# Allegro board 8880F5-0811-1.brd
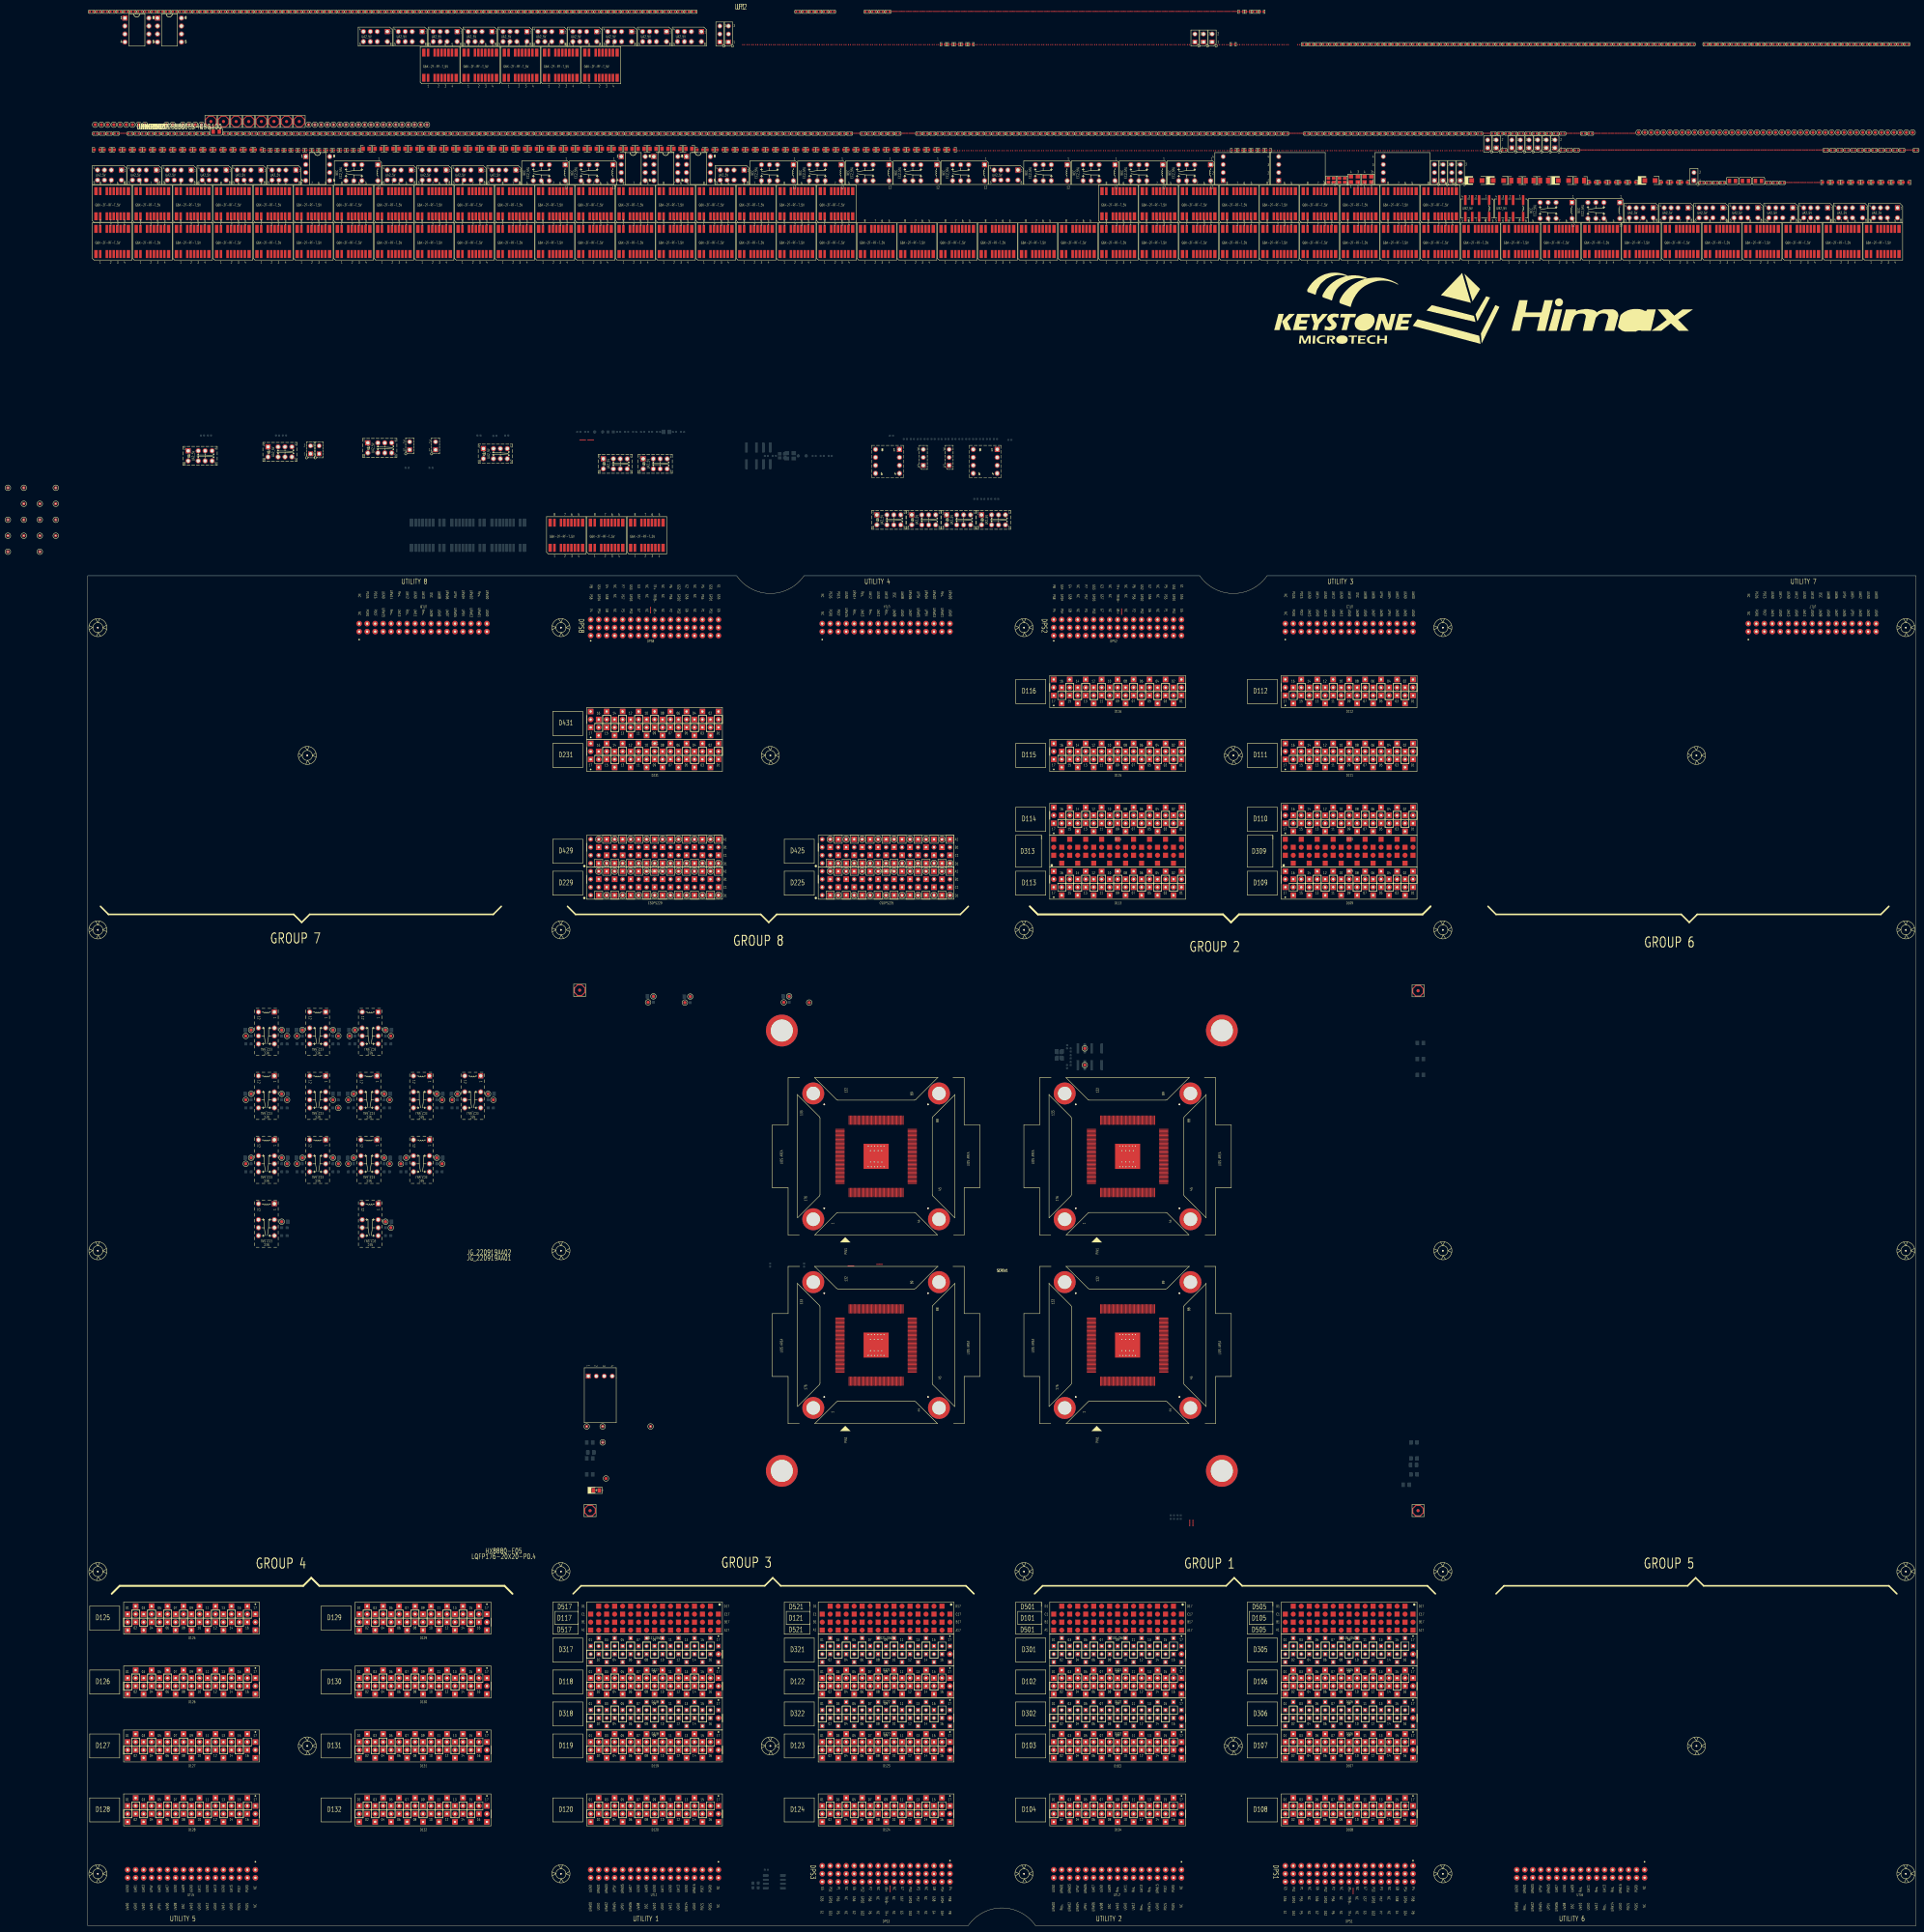
[diagram p0: board, top side]
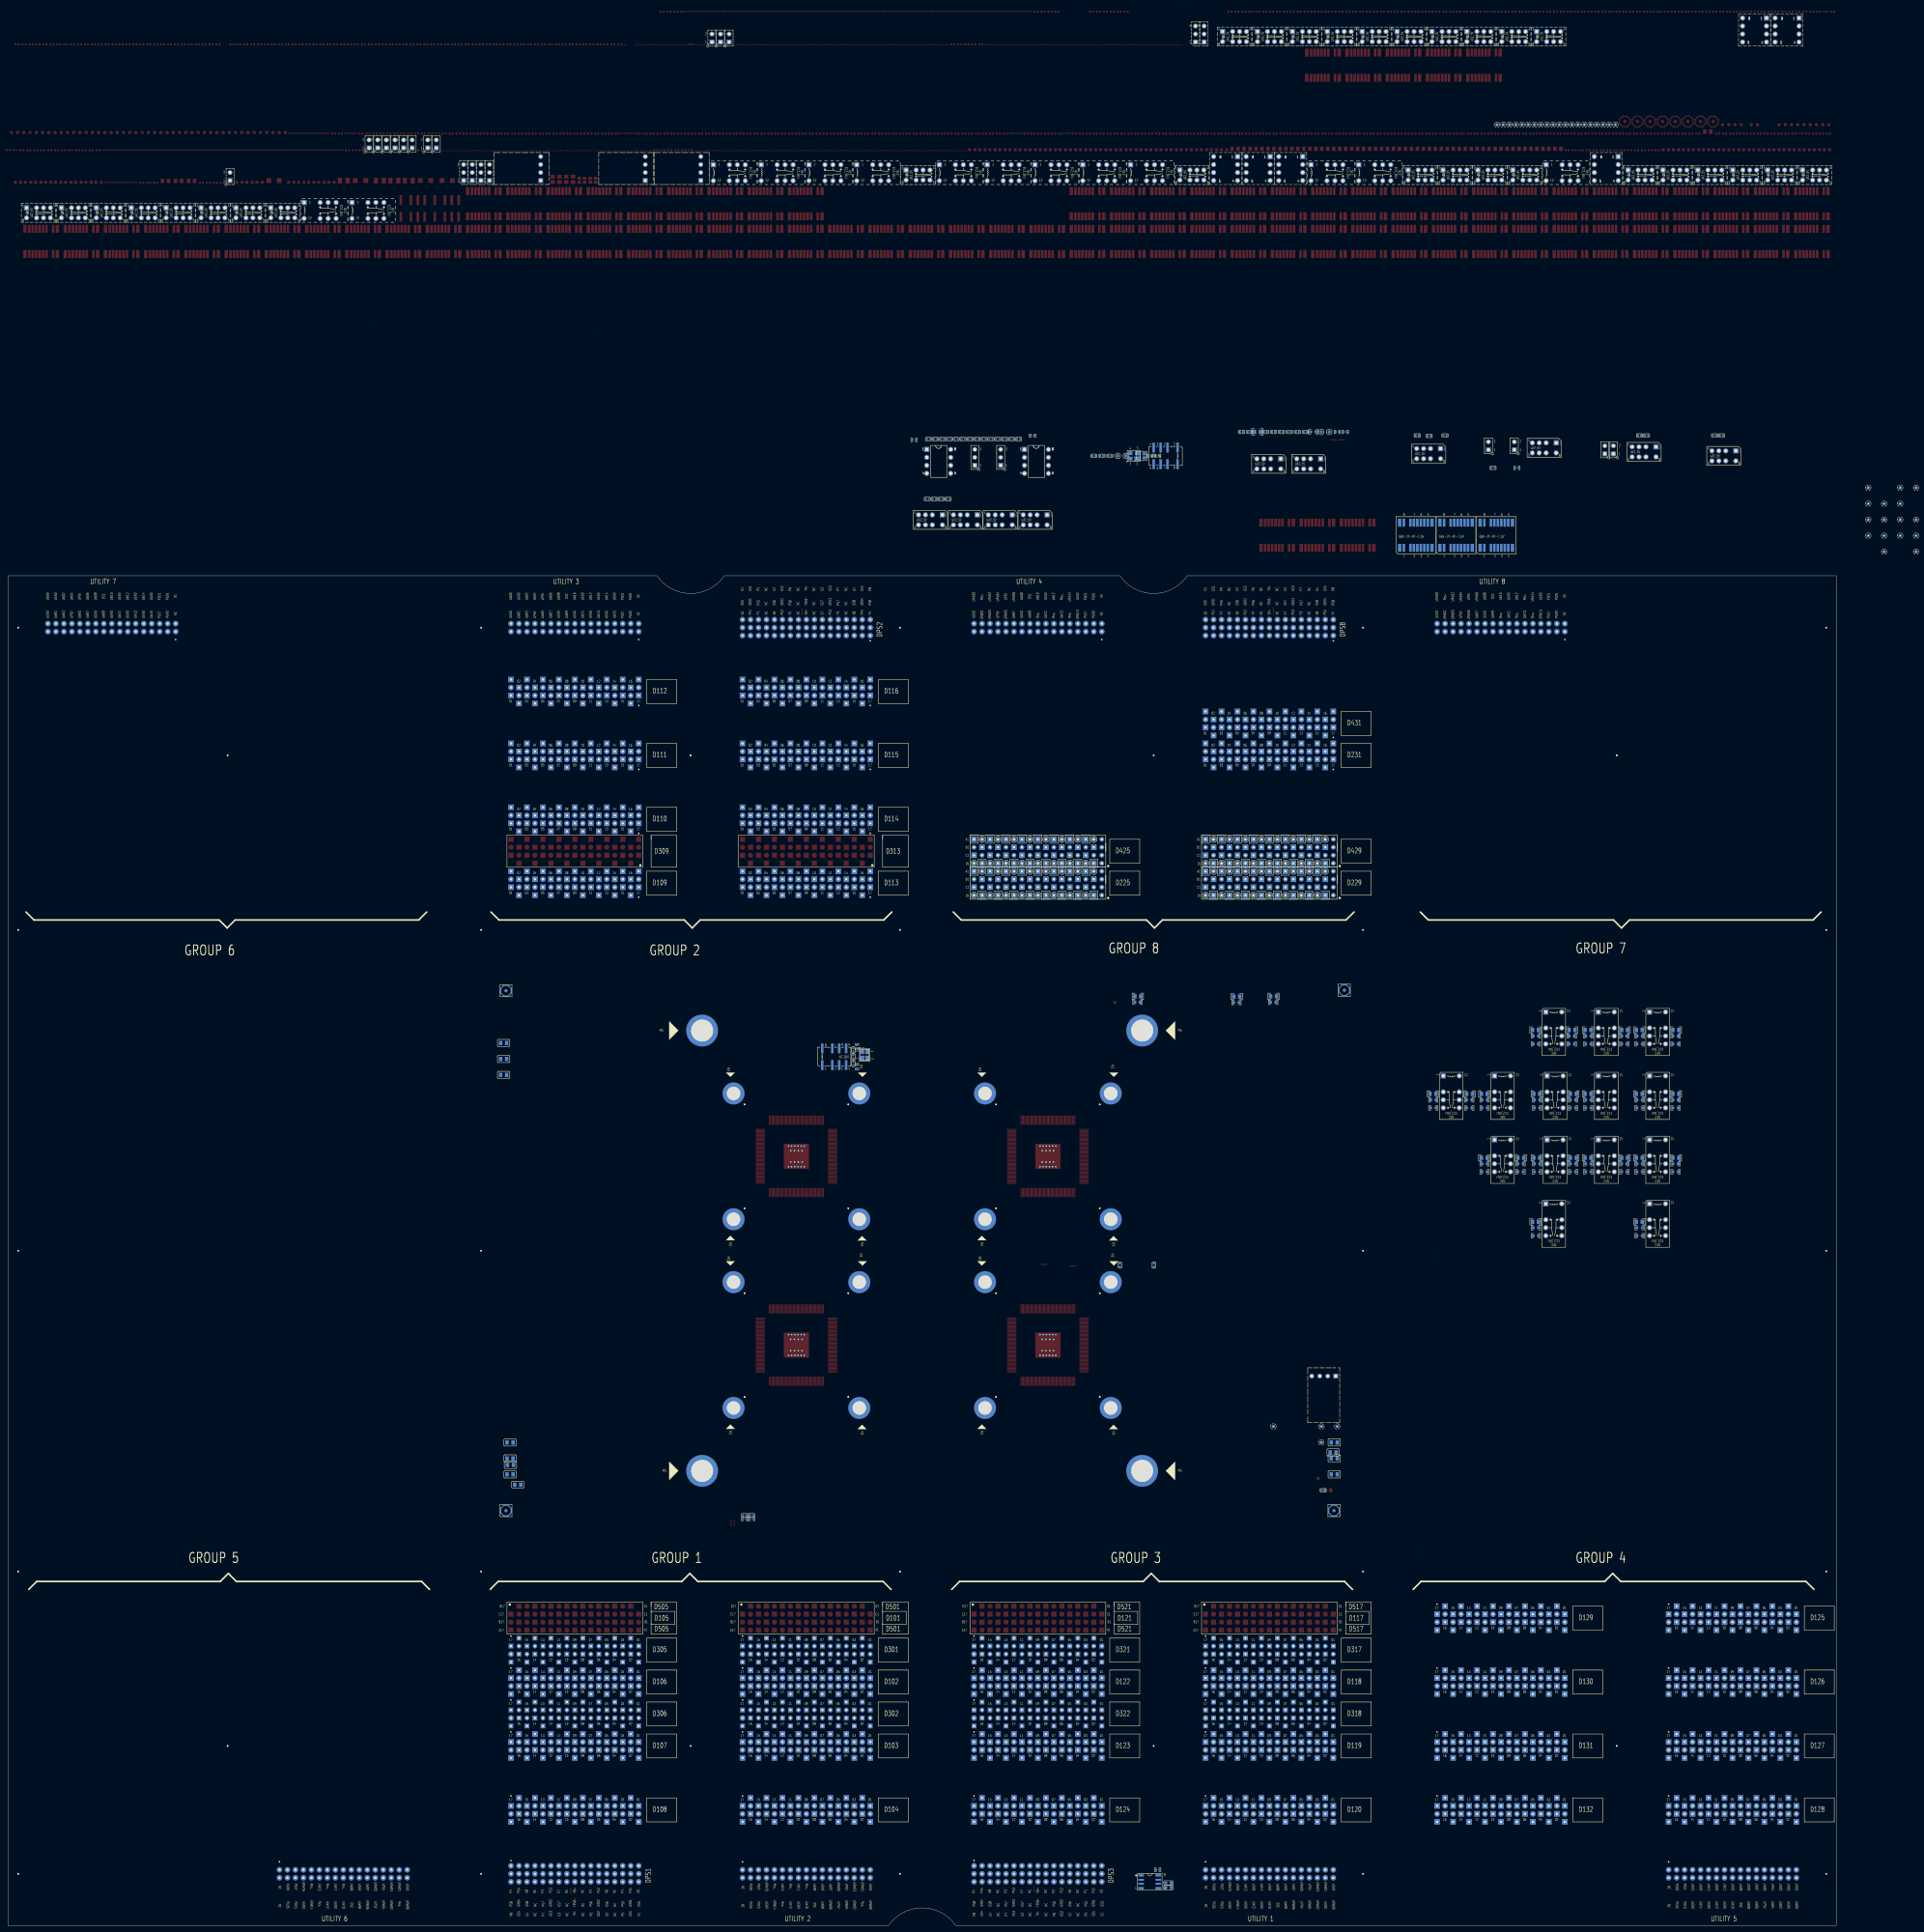
[diagram p1: board, bottom side, seen from below]

Outline 581.66 x 429.26 mm; copper layers: TOP, L02_DGND, L03_SIGNAL, L04_DGND, L05_SIGNAL, L06_DGND, L07_SIGNAL, L08_DGND, L09_SIGNAL, L10_DGND, L11_POWER, L12_DGND, L13_POWER, L14_DGND, L15_POWER, L16_DGND, L17_5V, L18_CBIT, L19_DGND, L20_POWER, L21_DGND, L22_POWER, L23_DGND, L24_POWER, L25_DGND, L26_SIGNAL, L27_DGND, L28_SIGNAL, L29_DGND, L30_SIGNAL, L31_DGND, L32_SIGNAL, L33_DGND, BOTTOM. Coordinates in mm from the lower left corner of the outline.

## Placement (name value [footprint] x y rotation side)
BD29  BD120-3A-S8  [FB0805]  159.72 143.51 180 bottom
BD30  BD120-3A-S8  [FB0805]  159.72 153.67 180 bottom
BD31  BD120-3A-S8  [FB0805]  160.07 150.51 0 bottom
BD32  BD120-3A-S8  [FB0805]  423.98 280.67 180 bottom
BD33  BD120-3A-S8  [FB0805]  423.98 275.59 180 bottom
BD34  BD120-3A-S8  [FB0805]  419.48 140.21 0 bottom
BD35  BD120-3A-S8  [FB0805]  421.94 148.59 180 bottom
BD36  BD120-3A-S8  [FB0805]  159.72 148.59 180 bottom
BD37  BD120-3A-S8  [FB0805]  421.94 153.67 180 bottom
BD38  BD120-3A-S8  [FB0805]  423.98 270.51 180 bottom
BD39  BD120-3A-S8  [FB0805]  421.8 146.5 0 bottom
BD40  BD120-3A-S8  [FB0805]  421.94 143.51 180 bottom
BD41  BD120-3A-S8  [FB0805]  531.55 554.78 0 top
BD42  BD120-3A-S8  [FB0805]  527.41 554.78 0 top
BD43  BD120-3A-S8  [FB0805]  523.27 554.78 0 top
BD44  BD120-3A-S8  [FB0805]  40.9 570.43 0 top
BR902  330-1-S4  [R0402]  163.26 138.43 180 bottom
C3  0.1U-16-X-S4-MU  [C0402]  158.75 474.98 180 bottom
C4  0.1U-16-X-S4-MU  [C0402]  156.21 474.98 180 bottom
C5  22P-50-N-S4-AVX  [C0402]  218.44 467.36 180 bottom
C6  22P-50-N-S4-AVX  [C0402]  215.9 467.36 180 bottom
C7  0.1U-16-X-S4-MU  [C0402]  101.6 463.55 180 bottom
C8  0.1U-16-X-S4-MU  [C0402]  255.7 473.77 180 bottom
C9  0.1U-16-X-S4-MU  [C0402]  293.37 472.44 180 bottom
CA1  NC/10U-10-X6S-S6-MU  [C0603]  128.2 262.58 0 bottom
CA2  NC/47U-10-X5R-S8-TDK  [C0805]  128.3 264.49 0 bottom
CA3  NC/10U-10-X6S-S6-MU  [C0603]  116.77 262.58 180 bottom
CA4  NC/47U-10-X5R-S8-TDK  [C0805]  116.67 264.49 180 bottom
CA5  NC/10U-10-X6S-S6-MU  [C0603]  95.59 221.94 0 bottom
CA6  NC/47U-10-X5R-S8-TDK  [C0805]  95.69 223.85 0 bottom
CA7  NC/10U-10-X6S-S6-MU  [C0603]  95.59 282.9 0 bottom
CA8  NC/47U-10-X5R-S8-TDK  [C0805]  95.69 284.81 0 bottom
CA9  NC/10U-10-X6S-S6-MU  [C0603]  84.16 282.9 180 bottom
CA10  NC/47U-10-X5R-S8-TDK  [C0805]  84.06 284.81 180 bottom
CA11  NC/10U-10-X6S-S6-MU  [C0603]  95.18 262.58 0 bottom
CA12  NC/47U-10-X5R-S8-TDK  [C0805]  95.28 264.49 0 bottom
CA13  NC/47U-10-X5R-S8-TDK  [C0805]  112 244.17 0 bottom
CA14  NC/10U-10-X6S-S6-MU  [C0603]  111.9 242.26 0 bottom
CA15  NC/47U-10-X5R-S8-TDK  [C0805]  100.37 244.17 180 bottom
CA16  NC/10U-10-X6S-S6-MU  [C0603]  100.47 242.26 180 bottom
CA17  NC/47U-10-X5R-S8-TDK  [C0805]  95.28 244.17 0 bottom
CA18  NC/10U-10-X6S-S6-MU  [C0603]  95.18 242.26 0 bottom
CA19  NC/47U-10-X5R-S8-TDK  [C0805]  184.15 474.98 180 bottom
CA20  NC/10U-10-X6S-S6-MU  [C0603]  166.37 474.98 180 bottom
CA21  10U-10-X6S-S6-MU  [C0603]  128.2 260.04 0 bottom
CA22  10U-10-X6S-S6-MU  [C0603]  116.77 260.04 180 bottom
CA23  10U-10-X6S-S6-MU  [C0603]  95.59 219.4 0 bottom
CA24  10U-10-X6S-S6-MU  [C0603]  95.59 280.36 0 bottom
CA25  10U-10-X6S-S6-MU  [C0603]  84.16 280.36 180 bottom
CA26  10U-10-X6S-S6-MU  [C0603]  95.18 260.04 0 bottom
CA27  10U-10-X6S-S6-MU  [C0603]  111.9 239.72 0 bottom
CA28  10U-10-X6S-S6-MU  [C0603]  100.47 239.72 180 bottom
CA29  10U-10-X6S-S6-MU  [C0603]  95.18 239.72 0 bottom
CA30  NC/47U-10-X5R-S8-TDK  [C0805]  222.21 295.51 180 bottom
CA31  10U-10-X6S-S6-MU  [C0603]  222.31 293.6 180 bottom
CA32  NC/10U-10-X6S-S6-MU  [C0603]  111.9 262.58 0 bottom
CA33  NC/47U-10-X5R-S8-TDK  [C0805]  112 264.49 0 bottom
CA34  10U-10-X6S-S6-MU  [C0603]  111.9 260.04 0 bottom
CA35  NC/10U-10-X6S-S6-MU  [C0603]  83.75 262.58 180 bottom
CA36  NC/47U-10-X5R-S8-TDK  [C0805]  83.65 264.49 180 bottom
CA37  10U-10-X6S-S6-MU  [C0603]  83.75 260.04 180 bottom
CA38  NC/10U-10-X6S-S6-MU  [C0603]  83.75 242.26 180 bottom
CA39  NC/47U-10-X5R-S8-TDK  [C0805]  83.65 244.17 180 bottom
CA40  10U-10-X6S-S6-MU  [C0603]  83.75 239.72 180 bottom
CB1  0.1U-25-X-S6  [C0603]  501.64 554.34 0 top
CB2  10U-16-T-SA  [CODE_A]  448.82 554.91 0 top
CB3  0.1U-25-X-S6  [C0603]  485.14 554.34 0 top
CB4  10U-16-T-SA  [CODE_A]  441.94 554.91 0 top
CB5  0.1U-25-X-S6  [C0603]  481.94 554.34 0 top
CB6  10U-16-T-SA  [CODE_A]  469.51 554.91 0 top
CB7  0.1U-25-X-S6  [C0603]  478.74 554.34 0 top
CB8  10U-16-T-SA  [CODE_A]  497.01 554.91 0 top
CB9  0.1U-25-X-S6  [C0603]  504.84 554.34 0 top
CB10  10U-25-X7R-SA  [C1206]  474.83 554.89 0 top
CB11  0.1U-25-X-S6  [C0603]  508.04 554.34 0 top
CB12  10U-25-X7R-SA  [C1206]  463.35 554.89 0 top
CB13  0.1U-25-X-S6  [C0603]  491.55 554.34 0 top
CB14  10U-25-X7R-SA  [C1206]  458.75 554.89 0 top
CB15  0.1U-25-X-S6  [C0603]  488.35 554.34 0 top
CB16  10U-25-X7R-SA  [C1206]  454.14 554.89 0 top
CB19  0.1U-25-X7R-S4-MU  [C0402]  215.9 17.78 180 bottom
CC1  0.47U-10-X6S-S2-TY  [C0201]  369.03 598.09 0 top
CC2  4.7U-10-X6T-S4-MU  [C0402]  274.41 598.23 0 top
CC4  0.47U-10-X6S-S2-TY  [C0201]  245.15 598.09 0 top
CC6  0.47U-10-X6S-S2-TY  [C0201]  246.56 598.09 0 top
CC7  0.47U-10-X6S-S2-TY  [C0201]  247.96 598.09 0 top
CC8  0.47U-10-X6S-S2-TY  [C0201]  249.36 598.09 0 top
CC9  0.47U-10-X6S-S2-TY  [C0201]  250.77 598.09 0 top
CC11  0.47U-10-X6S-S2-TY  [C0201]  231.12 598.09 0 top
CC13  0.47U-10-X6S-S2-TY  [C0201]  232.52 598.09 0 top
CC15  4.7U-2.5-X6S-S2-MU  [C0201]  264.8 598.09 0 top
CC16  NC/4.7U-2.5-X6S-S2-MU  [C0201]  270.41 598.09 0 top
CC17  4.7U-2.5-X6S-S2-MU  [C0201]  257.78 598.09 0 top
CC19  0.47U-10-X6S-S2-TY  [C0201]  233.93 598.09 0 top
CC20  4.7U-10-X6T-S4-MU  [C0402]  281.02 598.23 0 top
CC22  0.47U-10-X6S-S2-TY  [C0201]  235.33 598.09 0 top
CC23  4.7U-10-X6T-S4-MU  [C0402]  364.42 598.23 0 top
CC25  0.47U-10-X6S-S2-TY  [C0201]  236.73 598.09 0 top
CC26  0.47U-10-X6S-S2-TY  [C0201]  238.14 598.09 0 top
CC27  0.47U-10-X6S-S2-TY  [C0201]  239.54 598.09 0 top
CC28  0.47U-10-X6S-S2-TY  [C0201]  240.94 598.09 0 top
CC29  0.47U-10-X6S-S2-TY  [C0201]  243.75 598.09 0 top
CC30  0.47U-10-X6S-S2-TY  [C0201]  242.35 598.09 0 top
CC31  0.47U-10-X6S-S2-TY  [C0201]  367.62 598.09 0 top
CC32  0.47U-10-X6S-S2-TY  [C0201]  366.22 598.09 0 top
CC33  0.47U-10-X6S-S2-TY  [C0201]  323.52 598.09 0 top
CC34  0.47U-10-X6S-S2-TY  [C0201]  284.23 598.09 0 top
CC35  0.47U-10-X6S-S2-TY  [C0201]  361.21 598.09 0 top
CC36  0.47U-10-X6S-S2-TY  [C0201]  359.81 598.09 0 top
CC37  0.47U-10-X6S-S2-TY  [C0201]  282.83 598.09 0 top
CC38  NC/4.7U-2.5-X6S-S2-MU  [C0201]  267.6 598.09 0 top
CC39  0.47U-10-X6S-S2-TY  [C0201]  208.67 598.09 0 top
CC40  4.7U-2.5-X6S-S2-MU  [C0201]  259.18 598.09 0 top
CC41  4.7U-2.5-X6S-S2-MU  [C0201]  260.59 598.09 0 top
CC42  4.7U-2.5-X6S-S2-MU  [C0201]  261.99 598.09 0 top
CD1  0.1U-10-X7R-S2-MU  [C0201]  296.86 598.09 0 top
CD3  0.1U-10-X7R-S2-MU  [C0201]  341.76 598.09 0 top
CD4  0.1U-10-X7R-S2-MU  [C0201]  343.16 598.09 0 top
CD5  0.1U-10-X7R-S2-MU  [C0201]  344.56 598.09 0 top
CD6  0.1U-10-X7R-S2-MU  [C0201]  345.97 598.09 0 top
CD7  0.1U-10-X7R-S2-MU  [C0201]  347.37 598.09 0 top
CD8  0.1U-10-X7R-S2-MU  [C0201]  348.77 598.09 0 top
CD9  0.1U-10-X7R-S2-MU  [C0201]  350.18 598.09 0 top
CD10  0.1U-10-X7R-S2-MU  [C0201]  330.53 598.09 0 top
CD11  0.1U-10-X7R-S2-MU  [C0201]  331.94 598.09 0 top
CD12  0.1U-10-X7R-S2-MU  [C0201]  333.34 598.09 0 top
CD13  0.1U-10-X7R-S2-MU  [C0201]  334.74 598.09 0 top
CD14  0.1U-10-X7R-S2-MU  [C0201]  336.15 598.09 0 top
CD15  0.1U-10-X7R-S2-MU  [C0201]  337.55 598.09 0 top
CD16  0.1U-10-X7R-S2-MU  [C0201]  338.95 598.09 0 top
CD17  0.1U-10-X7R-S2-MU  [C0201]  340.35 598.09 0 top
CD18  0.1U-10-X7R-S2-MU  [C0201]  298.26 598.09 0 top
CD19  0.1U-10-X7R-S2-MU  [C0201]  299.66 598.09 0 top
CD20  0.1U-10-X7R-S2-MU  [C0201]  301.07 598.09 0 top
CD21  0.1U-10-X7R-S2-MU  [C0201]  302.47 598.09 0 top
CD22  0.1U-10-X7R-S2-MU  [C0201]  303.87 598.09 0 top
CD23  0.1U-10-X7R-S2-MU  [C0201]  305.28 598.09 0 top
CD24  0.1U-10-X7R-S2-MU  [C0201]  306.68 598.09 0 top
CD25  0.1U-10-X7R-S2-MU  [C0201]  308.08 598.09 0 top
CSDPS225  V93K_CSDPS_DPS32  [PG_VG93K_PF_DPS32_G8D225]  254 331.47 0 top
CSDPS229  V93K_CSDPS_DPS32  [PG_VG93K_PF_DPS32_G8D229]  180.34 331.47 0 top
CSDPS425  V93K_CSDPS_DPS32  [PG_VG93K_PF_DPS32_G8D425]  254 341.63 0 top
CSDPS429  V93K_CSDPS_DPS32  [PG_VG93K_PF_DPS32_G8D429]  180.34 341.63 0 top
D101/D501  V93K_PS1600 HD  [PG_VG93K_F_HSM_G1D101_501_ND]  327.66 97.79 0 top
D102  V93K_CH  [PG_VG93K_F_G1D102]  327.66 77.47 0 top
D103  V93K_CH  [PG_VG93K_F_G1D103]  327.66 57.15 0 top
D104  V93K_CH  [PG_VG93K_F_G1D104]  327.66 36.83 0 top
D105/D505  V93K_PS1600 HD  [PG_VG93K_F_HSM_G1D105_505_ND]  401.32 97.79 0 top
D106  V93K_CH  [PG_VG93K_F_G1D106]  401.32 77.47 0 top
D107  V93K_CH  [PG_VG93K_F_G1D107]  401.32 57.15 0 top
D108  V93K_CH  [PG_VG93K_F_G1D108]  401.32 36.83 0 top
D109  V93K_CH  [PG_VG93K_F_G2D109]  401.32 331.47 0 top
D110  V93K_CH  [PG_VG93K_F_G2D110]  401.32 351.79 0 top
D111  V93K_CH  [PG_VG93K_F_G2D111]  401.32 372.11 0 top
D112  V93K_CH  [PG_VG93K_F_G2D112]  401.32 392.43 0 top
D113  V93K_CH  [PG_VG93K_F_G2D113]  327.66 331.47 0 top
D114  V93K_CH  [PG_VG93K_F_G2D114]  327.66 351.79 0 top
D115  V93K_CH  [PG_VG93K_F_G2D115]  327.66 372.11 0 top
D116  V93K_CH  [PG_VG93K_F_G2D116]  327.66 392.43 0 top
D117/D517  V93K_PS1600 HD  [PG_VG93K_F_HSM_G3D117_517_ND]  180.34 97.79 0 top
D118  V93K_CH  [PG_VG93K_F_G3D118]  180.34 77.47 0 top
D119  V93K_CH  [PG_VG93K_F_G3D119]  180.34 57.15 0 top
D120  V93K_CH  [PG_VG93K_F_G3D120]  180.34 36.83 0 top
D121/D521  V93K_PS1600 HD  [PG_VG93K_F_HSM_G3D121_521_ND]  254 97.79 0 top
D122  V93K_CH  [PG_VG93K_F_G3D122]  254 77.47 0 top
D123  V93K_CH  [PG_VG93K_F_G3D123]  254 57.15 0 top
D124  V93K_CH  [PG_VG93K_F_G3D124]  254 36.83 0 top
D125  V93K_CH  [PG_VG93K_F_G4D125]  33.02 97.79 0 top
D126  V93K_CH  [PG_VG93K_F_G4D126]  33.02 77.47 0 top
D127  V93K_CH  [PG_VG93K_F_G4D127]  33.02 57.15 0 top
D128  V93K_CH  [PG_VG93K_F_G4D128]  33.02 36.83 0 top
D129  V93K_CH  [PG_VG93K_F_G4D129]  106.68 97.79 0 top
D130  V93K_CH  [PG_VG93K_F_G4D130]  106.68 77.47 0 top
D131  V93K_CH  [PG_VG93K_F_G4D131]  106.68 57.15 0 top
D132  V93K_CH  [PG_VG93K_F_G4D132]  106.68 36.83 0 top
D231  V93K_CH  [PG_VG93K_F_G8D231]  180.34 372.11 0 top
D301  V93K_CH  [PG_VG93K_F_G1D301]  327.66 87.63 0 top
D302  V93K_CH  [PG_VG93K_F_G1D302]  327.66 67.31 0 top
D305  V93K_CH  [PG_VG93K_F_G1D305]  401.32 87.63 0 top
D306  V93K_CH  [PG_VG93K_F_G1D306]  401.32 67.31 0 top
D309  V93K_PSSL  [PG_VG93K_F_PSSL_G2D309_ND]  401.32 341.63 0 top
D313  V93K_PSSL  [PG_VG93K_F_PSSL_G2D313_ND]  327.66 341.63 0 top
D317  V93K_CH  [PG_VG93K_F_G3D317]  180.34 87.63 0 top
D318  V93K_CH  [PG_VG93K_F_G3D318]  180.34 67.31 0 top
D321  V93K_CH  [PG_VG93K_F_G3D321]  254 87.63 0 top
D322  V93K_CH  [PG_VG93K_F_G3D322]  254 67.31 0 top
D431  V93K_CH  [PG_VG93K_F_G8D431]  180.34 382.27 0 top
DPS1  V93K_DPS  [PG_VG93K_F_G1DPS1]  401.32 16.51 0 top
DPS2  V93K_DPS  [PG_VG93K_F_G2DPS2]  327.66 412.75 0 top
DPS3  V93K_DPS  [PG_VG93K_F_G3DPS3]  254 16.51 0 top
DPS8  V93K_DPS  [PG_VG93K_F_G8DPS8]  180.34 412.75 0 top
FD1  -  [FD_040_V2]  159.82 131.98 0 top
FD2  -  [FD_040_V2]  423.24 131.98 0 top
FD3  -  [FD_040_V2]  423.24 297.28 0 top
FD4  -  [FD_040_V2]  156.51 297.46 0 top
FD5  -  [FD_040_V2]  159.82 131.98 180 bottom
FD6  -  [FD_040_V2]  423.24 131.98 180 bottom
FD7  -  [FD_040_V2]  423.24 297.28 180 bottom
FD8  -  [FD_040_V2]  156.51 297.46 180 bottom
FD9  -  [FD_040_V2]  67.28 573.68 0 top
FD10  -  [FD_040_V2]  39.19 573.68 0 top
FD11  -  [FD_040_V2]  43.21 573.68 0 top
FD12  -  [FD_040_V2]  47.22 573.68 0 top
FD13  -  [FD_040_V2]  51.23 573.68 0 top
FD14  -  [FD_040_V2]  55.24 573.68 0 top
FD15  -  [FD_040_V2]  59.26 573.68 0 top
FD16  -  [FD_040_V2]  63.27 573.68 0 top
GND1  TP01  [TP_040_T]  112.75 262.58 0 top
GND2  TP01  [TP_040_T]  66.6 282.9 180 top
GND3  TP01  [TP_040_T]  96.03 242.26 0 top
GND4  TP01  [TP_040_T]  83.31 282.9 180 top
GND5  TP01  [TP_040_T]  96.44 282.9 0 top
GND6  TP01  [TP_040_T]  82.9 262.58 180 top
GND7  TP01  [TP_040_T]  96.03 262.58 0 top
GND8  TP01  [TP_040_T]  82.9 242.26 180 top
GND9  TP01  [TP_040_T]  79.73 282.9 0 top
GND10  TP01  [TP_040_T]  163.83 474.98 180 bottom
GND11  TP01  [TP_040_T]  112.75 242.26 0 top
GND12  TP01  [TP_040_T]  178.28 293.6 180 top
GND13  TP01  [TP_040_T]  189.99 293.53 180 top
GND14  TP01  [TP_040_T]  99.62 242.26 180 top
HX8880-F05  REF-CODE-CHIP  [CHIP_CODE]  132.16 119.28 0 top
J1  HDR-2X1-M  [JP_2P_100]  110.66 469.28 180 bottom
J2  HDR-3X1-M  [JP_3P_100]  265.84 464.33 180 bottom
J3  HDR-3X1-M  [JP_3P_100]  274.07 464.33 180 bottom
J4  HDR-2X1-M  [JP_2P_100]  73.63 468.01 180 bottom
J5  HDR-2X1-M  [JP_2P_100]  70.88 468.01 180 bottom
JG_220919AA01  REF-CODE-SOCKET  [SOCKET_CODE]  127.51 212.43 0 top
JG_220919AA02  REF-CODE-SOCKET  [SOCKET_CODE]  127.51 214.21 0 top
K1  G6K-2F-RF-T-5V-SPECIAL  [RL_G6K2FRT_8P_5V_GR]  174.16 547.53 0 top
K2  G6K-2F-RF-T-5V-SPECIAL  [RL_G6K2FRT_8P_5V_GR]  225.38 547.53 0 top
K3  G6K-2F-RF-T-5V-SPECIAL  [RL_G6K2FRT_8P_5V_GR]  340.6 547.53 0 top
K4  G6K-2F-RF-T-5V-SPECIAL  [RL_G6K2FRT_8P_5V_GR]  366.21 547.53 0 top
K5  G6K-2F-RF-T-5V-SPECIAL  [RL_G6K2FRT_8P_5V_GR]  391.82 547.53 0 top
K6  G6K-2F-RF-T-5V-SPECIAL  [RL_G6K2FRT_8P_5V_GR]  404.62 547.53 0 top
K7  G6K-2F-RF-T-5V-SPECIAL  [RL_G6K2FRT_8P_5V_GR]  417.42 547.53 0 top
K8  G6K-2F-RF-T-5V-SPECIAL  [RL_G6K2FRT_8P_5V_GR]  430.23 547.53 0 top
K9  UA2-5NJ-A-V3  [RL_NECUA2_5V_V3]  167.64 464.82 180 bottom
K10  UA2-5NJ-A-V3  [RL_NECUA2_5V_V3]  92.71 469.9 180 bottom
K11  G6K-2F-RF-T-5V-SPECIAL  [RL_G6K2FRT_8P_5V_GR]  186.97 547.53 0 top
K12  UA2-5NJ-A-V3  [RL_NECUA2_5V_V3]  180.34 464.82 180 bottom
K13  UA2-5NJ-A-V3  [RL_NECUA2_5V_V3]  35.56 467.36 180 bottom
K14  UA2-5NJ-A-V3  [RL_NECUA2_5V_V3]  254.66 447.01 180 bottom
K15  UA2-5NJ-A-V3  [RL_NECUA2_5V_V3]  265.77 447.01 180 bottom
K16  G6K-2F-RF-T-5V-SPECIAL  [RL_G6K2FRT_8P_5V_GR]  199.77 547.53 0 top
K17  G6K-2F-RF-T-5V-SPECIAL  [RL_G6K2FRT_8P_5V_GR]  212.57 547.53 0 top
K18  UB2-5NU-B  [RL_NECUB2_5V]  213.36 467.36 180 bottom
K19  UA2-5NJ-A-V3  [RL_NECUA2_5V_V3]  276.87 447.01 180 bottom
K20  UA2-5NJ-A-V3  [RL_NECUA2_5V_V3]  287.97 447.01 180 bottom
K21  G6K-2F-RF-T-5V-SPECIAL  [RL_G6K2FRT_8P_5V_GR]  238.18 547.53 0 top
K22  G6K-2F-RF-T-5V-SPECIAL  [RL_G6K2FRT_8P_5V_GR]  133.83 442.12 180 bottom
K23  G6K-2F-RF-T-5V-SPECIAL  [RL_G6K2FRT_8P_5V_GR]  121.02 442.12 180 bottom
K24  G6K-2F-RF-T-5V-SPECIAL  [RL_G6K2FRT_8P_5V_GR]  108.22 442.12 180 bottom
K25  G6K-2F-RF-T-5V-SPECIAL  [RL_G6K2FRT_8P_5V_GR]  152.23 442.12 0 top
K26  G6K-2F-RF-T-5V-SPECIAL  [RL_G6K2FRT_8P_5V_GR]  165.03 442.12 0 top
K27  G6K-2F-RF-T-5V-SPECIAL  [RL_G6K2FRT_8P_5V_GR]  177.84 442.12 0 top
K28  UA2-5NJ-A-V3  [RL_NECUA2_5V_V3]  60.96 468.63 180 bottom
K29  G6K-2F-RF-T-5V-SPECIAL  [RL_G6K2FRT_8P_5V_GR]  327.8 547.53 0 top
K30  G6K-2F-RF-T-5V-SPECIAL  [RL_G6K2FRT_8P_5V_GR]  353.41 547.53 0 top
K31  EC2-5NJ-A  [RL_NECEC2_10P_5V]  106.18 263.85 90 bottom
K33  NC/UA2-5NJ-A-V3  [RL_NECUA2_5V_V3]  129.49 468.06 180 bottom
K34  EC2-5NJ-A  [RL_NECEC2_10P_5V]  122.49 263.85 90 bottom
K36  EC2-5NJ-A  [RL_NECEC2_10P_5V]  89.87 223.21 90 bottom
K37  EC2-5NJ-A  [RL_NECEC2_10P_5V]  89.87 284.17 90 bottom
K39  EC2-5NJ-A  [RL_NECEC2_10P_5V]  89.47 263.85 90 bottom
K40  EC2-5NJ-A  [RL_NECEC2_10P_5V]  106.18 243.53 90 bottom
K42  EC2-5NJ-A  [RL_NECEC2_10P_5V]  89.47 243.53 90 bottom
K43  G6K-2F-RF-T-5V-SPECIAL  [RL_G6K2FRT_8P_5V_GR]  379.01 547.53 0 top
LD902  LDG-2-S8  [LED_0805]  161.81 138.43 0 top
LOGO1  -  [LOGO_KT_KSMT]  396.33 507.32 0 top
LOGO2  LOGO_HX_Himax  [LOGO_HX_HIMAX]  464.68 508.97 0 top
LQFP176-20X20-P0.4  REF-CODE-CHIP  [CHIP_CODE]  132.16 117.51 0 top
NOREF  -  []  121.09 595.57 0 top
NOREF#2  -  []  307.23 564.09 90 top
NOREF#3  -  []  375.26 551.53 0 top
NOREF#4  -  []  210.92 531.53 0 top
NOREF#5  -  []  215.39 598.09 0 top
NOREF#6  -  []  315.9 598.41 0 top
NOREF#7  -  []  373.37 544.8 90 top
NOREF#8  -  []  168.88 446.12 0 top
NOREF#9  -  []  531.35 543.03 90 top
NOREF#10  -  []  103.45 438.67 90 top
NOREF#11  -  []  157.86 438.67 90 top
NOREF#12  -  []  130.11 544.8 90 top
NOREF#13  -  []  118.27 438.12 0 top
NOREF#14  -  []  382.26 597.77 90 top
NOREF#15  -  []  168.48 563.8 0 top
NOREF#16  -  []  181.69 446.12 0 top
NOREF#17  -  []  168.52 544.8 90 top
NOREF#18  -  []  63.04 543.58 90 top
NOREF#19  -  []  377.36 543.53 0 top
NOREF#20  -  []  555.41 547.63 0 top
NOREF#21  -  []  81.61 282.45 90 top
NOREF#22  -  []  300.77 598.09 0 top
NOREF#23  -  []  92.12 602.28 0 top
NOREF#24  -  []  390.6 564.09 90 top
NOREF#25  -  []  119.2 539.53 0 top
NOREF#26  -  []  283.97 448.61 0 top
NOREF#27  -  []  171.24 463.22 90 top
NOREF#28  -  []  290.89 564.41 0 top
NOREF#29  -  []  231.15 219.63 90 top
NOREF#30  -  []  162.39 461.82 90 top
NOREF#31  -  []  342.86 598.09 0 top
NOREF#32  -  []  221 598.09 0 top
NOREF#33  -  []  156.07 587.12 90 top
NOREF#34  -  []  134.1 543.53 0 top
NOREF#35  -  []  267.64 539.53 0 top
NOREF#36  -  []  379.88 564.41 0 top
NOREF#37  -  []  464.89 539.53 0 top
NOREF#38  -  []  170.23 438.12 90 top
NOREF#39  -  []  400.87 539.53 0 top
NOREF#40  -  []  334.96 544.8 90 top
NOREF#41  -  []  400.32 553.99 90 top
NOREF#42  -  []  409.34 564.41 0 top
NOREF#43  -  []  307.48 598.41 0 top
NOREF#44  -  []  279.67 564.41 0 top
NOREF#45  -  []  310.47 275.23 90 top
NOREF#46  -  []  212.08 597.77 90 top
NOREF#47  -  []  31.68 551.53 0 top
NOREF#48  -  []  109.92 602.28 0 top
NOREF#49  -  []  428.69 564.73 0 top
NOREF#50  -  []  417.97 531.53 0 top
NOREF#51  -  []  210.88 598.41 0 top
NOREF#52  -  []  185.79 597.68 90 top
NOREF#53  -  []  24.38 551.53 0 top
NOREF#54  -  []  219.13 553.43 0 top
NOREF#55  -  []  116.25 438.67 90 top
NOREF#56  -  []  236.13 598.41 0 top
NOREF#57  -  []  237.54 598.41 0 top
NOREF#58  -  []  231 532.08 90 top
NOREF#59  -  []  174.09 446.12 0 top
NOREF#60  -  []  193.32 541.63 90 top
NOREF#61  -  []  303.22 564.73 0 top
NOREF#62  -  []  319.33 176.03 90 top
NOREF#63  -  []  319.85 564.09 90 top
NOREF#64  -  []  462.39 541.43 0 top
NOREF#65  -  []  410.45 564.73 0 top
NOREF#66  -  []  225.83 264.31 0 top
NOREF#67  -  []  297.91 564.41 0 top
NOREF#68  -  []  116.5 541.63 90 top
NOREF#69  -  []  300.26 597.77 90 top
NOREF#70  -  []  322.92 598.41 0 top
NOREF#71  -  []  8.27 531.53 0 top
NOREF#72  -  []  131.19 585.67 90 top
NOREF#73  -  []  1.47 559.64 0 top
NOREF#74  -  []  77.36 532.08 90 top
NOREF#75  -  []  93.11 471.5 0 top
NOREF#76  -  []  87.46 472.05 0 top
NOREF#77  -  []  6.07 551.53 0 top
NOREF#78  -  []  152.48 597.68 90 top
NOREF#79  -  []  228.02 598.09 0 top
NOREF#80  -  []  311.69 598.41 0 top
NOREF#81  -  []  330.18 242.88 0 top
NOREF#82  -  []  505.95 546.23 0 top
NOREF#83  -  []  379.95 598.09 0 top
NOREF#84  -  []  325.67 564.73 0 top
NOREF#85  -  []  161.94 599.08 90 top
NOREF#86  -  []  378.48 564.41 0 top
NOREF#87  -  []  190.82 551.53 0 top
NOREF#88  -  []  289.19 564.73 0 top
NOREF#89  -  []  261.77 448.61 0 top
NOREF#90  -  []  329.73 597.77 90 top
NOREF#91  -  []  290.65 598.41 0 top
NOREF#92  -  []  351.76 531.53 0 top
NOREF#93  -  []  244.55 598.41 0 top
NOREF#94  -  []  141.38 531.08 90 top
NOREF#95  -  []  311.25 539.53 0 top
NOREF#96  -  []  554.51 539.53 0 top
NOREF#97  -  []  245.34 532.8 90 top
NOREF#98  -  []  318.71 598.41 0 top
NOREF#99  -  []  226.31 598.41 0 top
NOREF#100  -  []  229.42 598.09 0 top
NOREF#101  -  []  219.76 293.15 90 top
NOREF#102  -  []  139.85 543.58 90 top
NOREF#103  -  []  256.98 597.77 90 top
NOREF#104  -  []  336.85 551.53 0 top
NOREF#105  -  []  305.82 564.09 90 top
NOREF#106  -  []  230.52 598.41 0 top
NOREF#107  -  []  106.41 558.24 0 top
NOREF#108  -  []  296.2 564.73 0 top
NOREF#109  -  []  329.68 564.09 90 top
NOREF#110  -  []  149.11 543.53 0 top
NOREF#111  -  []  308.54 529.63 90 top
NOREF#112  -  []  343.71 564.09 90 top
NOREF#113  -  []  251.58 564.25 90 top
NOREF#114  -  []  303.07 597.77 90 top
NOREF#115  -  []  142.31 541.43 0 top
NOREF#116  -  []  326.23 173.13 0 top
NOREF#117  -  []  249.41 444.01 90 top
NOREF#118  -  []  134.1 539.53 0 top
NOREF#119  -  []  394.81 564.09 90 top
NOREF#120  -  []  290.39 564.09 90 top
NOREF#121  -  []  335.85 598.09 0 top
NOREF#122  -  []  523.75 546.23 0 top
NOREF#123  -  []  437.93 531.53 0 top
NOREF#124  -  []  15.43 531.53 0 top
NOREF#125  -  []  428.99 564.41 0 top
NOREF#126  -  []  436.58 529.63 90 top
NOREF#127  -  []  233.33 598.41 0 top
NOREF#128  -  []  108.5 531.53 0 top
NOREF#129  -  []  328.33 597.77 90 top
NOREF#130  -  []  167.71 529.63 90 top
NOREF#131  -  []  463.54 531.53 0 top
NOREF#132  -  []  296.26 598.41 0 top
NOREF#133  -  []  314.24 564.09 90 top
NOREF#134  -  []  247.16 597.77 90 top
NOREF#135  -  []  354.03 564.41 0 top
NOREF#136  -  []  328.35 543.53 0 top
NOREF#137  -  []  81.61 279.91 90 top
NOREF#138  -  []  367.32 598.09 0 top
NOREF#139  -  []  434.33 543.58 90 top
NOREF#140  -  []  144.8 588.84 90 top
NOREF#141  -  []  331.9 543.58 90 top
NOREF#142  -  []  159.39 439.39 90 top
NOREF#143  -  []  421.27 551.53 0 top
NOREF#144  -  []  258.69 531.53 0 top
NOREF#145  -  []  331.34 598.41 0 top
NOREF#146  -  []  61.72 240.17 90 top
NOREF#147  -  []  136.22 558.24 0 top
NOREF#148  -  []  359.03 531.08 90 top
NOREF#149  -  []  510.8 541.63 90 top
NOREF#150  -  []  349.66 551.53 0 top
NOREF#151  -  []  64.56 531.08 90 top
NOREF#152  -  []  29.58 551.53 0 top
NOREF#153  -  []  94.74 280.81 90 top
NOREF#154  -  []  206.32 541.43 0 top
NOREF#155  -  []  261.19 597.77 90 top
NOREF#156  -  []  166.56 543.53 90 top
NOREF#157  -  []  12.92 531.53 90 top
NOREF#158  -  []  359.34 564.73 0 top
NOREF#159  -  []  175.09 461.82 90 top
NOREF#160  -  []  477.69 539.53 0 top
NOREF#161  -  []  359.76 529.63 90 top
NOREF#162  -  []  134.38 446.12 0 top
NOREF#163  -  []  102.97 543.08 90 top
NOREF#164  -  []  223.51 598.41 0 top
NOREF#165  -  []  126.97 559.64 0 top
NOREF#166  -  []  341.46 598.09 0 top
NOREF#167  -  []  230.58 531.53 90 top
NOREF#168  -  []  88.39 551.53 0 top
NOREF#169  -  []  402.97 539.53 0 top
NOREF#170  -  []  295.94 558.24 0 top
NOREF#171  -  []  208.07 598.41 0 top
NOREF#172  -  []  51.76 531.08 90 top
NOREF#173  -  []  475.19 541.43 0 top
NOREF#174  -  []  331.58 564.41 0 top
NOREF#175  -  []  85.09 531.53 0 top
NOREF#176  -  []  346.95 529.63 90 top
NOREF#177  -  []  154.29 595.57 0 top
NOREF#178  -  []  256.08 598.09 0 top
NOREF#179  -  []  220.16 466.73 90 top
NOREF#180  -  []  141.74 587.62 90 top
NOREF#181  -  []  10.57 607.84 0 top
NOREF#182  -  []  346.51 564.09 90 top
NOREF#183  -  []  128.94 587.62 90 top
NOREF#184  -  []  153.76 531.53 90 top
NOREF#185  -  []  176.34 466.42 0 top
NOREF#186  -  []  102.58 439.39 90 top
NOREF#187  -  []  330.18 564.41 0 top
NOREF#188  -  []  61.72 219.85 90 top
NOREF#189  -  []  324.12 597.77 90 top
NOREF#190  -  []  146.91 539.53 0 top
NOREF#191  -  []  388 564.73 0 top
NOREF#192  -  []  150.58 438.12 0 top
NOREF#193  -  []  299.06 598.41 0 top
NOREF#194  -  []  40.49 532.8 90 top
NOREF#195  -  []  435.85 531.08 90 top
NOREF#196  -  []  257.99 564.25 90 top
NOREF#197  -  []  533.2 547.63 0 top
NOREF#198  -  []  66.24 555.04 90 top
NOREF#199  -  []  131.99 588.84 90 top
NOREF#200  -  []  567.31 539.53 0 top
NOREF#201  -  []  493.25 556.18 0 top
NOREF#202  -  []  123.19 595.57 0 top
NOREF#203  -  []  341.63 195.43 90 top
NOREF#204  -  []  116.5 529.63 90 top
NOREF#205  -  []  102.54 531.53 90 top
NOREF#206  -  []  206.32 553.43 0 top
NOREF#207  -  []  82.89 531.53 0 top
NOREF#208  -  []  115.77 544.08 90 top
NOREF#209  -  []  12.58 559.64 0 top
NOREF#210  -  []  400.63 564.73 0 top
NOREF#211  -  []  314.5 598.41 0 top
NOREF#212  -  []  125.43 602.28 0 top
NOREF#213  -  []  352.33 564.73 0 top
NOREF#214  -  []  342.81 564.41 0 top
NOREF#215  -  []  466.99 539.53 0 top
NOREF#216  -  []  543.8 531.53 0 top
NOREF#217  -  []  315.64 564.09 90 top
NOREF#218  -  []  185.32 543.53 0 top
NOREF#219  -  []  245.88 531.53 0 top
NOREF#220  -  []  435.85 543.08 90 top
NOREF#221  -  []  297.46 597.77 90 top
NOREF#222  -  []  300.21 564.09 90 top
NOREF#223  -  []  44.03 555.04 90 top
NOREF#224  -  []  246.23 233.13 0 top
NOREF#225  -  []  161.28 446.12 0 top
NOREF#226  -  []  109.92 602.28 0 top
NOREF#227  -  []  23.48 553.64 90 top
NOREF#228  -  []  14.07 529.63 90 top
NOREF#229  -  []  187.52 531.53 0 top
NOREF#230  -  []  383.79 564.73 0 top
NOREF#231  -  []  87.72 602.28 0 top
NOREF#232  -  []  6.07 539.53 0 top
NOREF#233  -  []  347.02 564.41 0 top
NOREF#234  -  []  329.93 598.41 0 top
NOREF#235  -  []  18.88 551.53 0 top
NOREF#236  -  []  435.7 564.73 0 top
NOREF#237  -  []  231 543.08 90 top
NOREF#238  -  []  319.33 243.63 90 top
NOREF#239  -  []  200.33 564.25 90 top
NOREF#240  -  []  312.89 597.77 90 top
NOREF#241  -  []  357.51 531.58 90 top
NOREF#242  -  []  325.72 598.41 0 top
NOREF#243  -  []  271.62 449.16 0 top
NOREF#244  -  []  577.41 541.63 90 top
NOREF#245  -  []  307.39 531.53 90 top
NOREF#246  -  []  479.79 539.53 0 top
NOREF#247  -  []  158.79 448.02 0 top
NOREF#248  -  []  324.32 598.41 0 top
NOREF#249  -  []  563.88 531.08 90 top
NOREF#250  -  []  48.59 241.81 90 top
NOREF#251  -  []  402.03 564.73 0 top
NOREF#252  -  []  121.09 595.57 0 top
NOREF#253  -  []  319.33 183.63 90 top
NOREF#254  -  []  78.03 242.71 90 top
NOREF#255  -  []  333 531.53 90 top
NOREF#256  -  []  347.07 598.09 0 top
NOREF#257  -  []  263.83 171.63 90 top
NOREF#258  -  []  541.7 539.53 0 top
NOREF#259  -  []  95.7 551.53 0 top
NOREF#260  -  []  415.77 531.53 0 top
NOREF#261  -  []  219.73 544.8 90 top
NOREF#262  -  []  97.51 558.24 0 top
NOREF#263  -  []  157.6 588.84 90 top
NOREF#264  -  []  293.2 564.09 90 top
NOREF#265  -  []  133.09 466.46 90 top
NOREF#266  -  []  104.37 446.12 0 top
NOREF#267  -  []  104.76 559.64 0 top
NOREF#268  -  []  282.72 444.01 90 top
NOREF#269  -  []  144.81 539.53 0 top
NOREF#270  -  []  249.41 449.16 0 top
NOREF#271  -  []  349.66 539.53 0 top
NOREF#272  -  []  511 547.63 0 top
NOREF#273  -  []  172.19 439.39 90 top
NOREF#274  -  []  473.84 531.53 90 top
NOREF#275  -  []  426.48 551.53 0 top
NOREF#276  -  []  402.97 543.53 0 top
NOREF#277  -  []  293.75 598.09 0 top
NOREF#278  -  []  417.76 564.41 0 top
NOREF#279  -  []  435.85 544.08 90 top
NOREF#280  -  []  536.5 539.53 0 top
NOREF#281  -  []  242.95 597.77 90 top
NOREF#282  -  []  445.06 556.18 0 top
NOREF#283  -  []  62.79 551.53 0 top
NOREF#284  -  []  447.58 543.03 90 top
NOREF#285  -  []  322.23 173.13 90 top
NOREF#286  -  []  349.66 539.53 0 top
NOREF#287  -  []  141.58 603.68 0 top
NOREF#288  -  []  157.61 539.53 0 top
NOREF#289  -  []  536.75 531.58 90 top
NOREF#290  -  []  77.36 543.08 90 top
NOREF#291  -  []  213.68 598.41 0 top
NOREF#292  -  []  239.33 243.63 90 top
NOREF#293  -  []  345.37 598.41 0 top
NOREF#294  -  []  36.43 558.24 0 top
NOREF#295  -  []  195.25 599.08 90 top
NOREF#296  -  []  128.63 602.28 0 top
NOREF#297  -  []  193.32 529.63 90 top
NOREF#298  -  []  441.38 539.53 0 top
NOREF#299  -  []  294.65 597.77 90 top
NOREF#300  -  []  265.6 598.41 0 top
NOREF#301  -  []  291.97 448.61 0 top
NOREF#302  -  []  142.84 587.57 90 top
NOREF#303  -  []  397.82 564.73 0 top
NOREF#304  -  []  229.23 539.53 0 top
NOREF#305  -  []  349.66 551.53 0 top
NOREF#306  -  []  327.43 598.09 0 top
NOREF#307  -  []  88.64 543.58 90 top
NOREF#308  -  []  26.15 543.08 90 top
NOREF#309  -  []  27.08 541.43 0 top
NOREF#310  -  []  395.67 539.53 0 top
NOREF#311  -  []  332.54 597.77 90 top
NOREF#312  -  []  436 564.41 0 top
NOREF#313  -  []  139.73 602.28 0 top
NOREF#314  -  []  209.48 598.41 0 top
NOREF#315  -  []  360.61 598.41 0 top
NOREF#316  -  []  398.97 544.8 90 top
NOREF#317  -  []  3.12 558.24 0 top
NOREF#318  -  []  347.97 597.77 90 top
NOREF#319  -  []  152.69 603.68 0 top
NOREF#320  -  []  319.41 273.66 0 top
NOREF#321  -  []  1.47 559.64 0 top
NOREF#322  -  []  223.73 551.53 0 top
NOREF#323  -  []  522.1 547.63 0 top
NOREF#324  -  []  161.6 595.57 0 top
NOREF#325  -  []  163.61 137.43 90 top
NOREF#326  -  []  313.35 539.53 0 top
NOREF#327  -  []  64.56 544.08 90 top
NOREF#328  -  []  442.51 564.09 90 top
NOREF#329  -  []  285.03 598.41 0 top
NOREF#330  -  []  157.61 551.53 0 top
NOREF#331  -  []  230.32 597.77 90 top
NOREF#332  -  []  234.33 168.13 90 top
NOREF#333  -  []  157.61 551.53 0 top
NOREF#334  -  []  88.71 471.5 0 top
NOREF#335  -  []  320.62 532.08 90 top
NOREF#336  -  []  93.66 559.64 0 top
NOREF#337  -  []  44.03 558.24 0 top
NOREF#338  -  []  128.15 543.53 90 top
NOREF#339  -  []  307.82 531.08 90 top
NOREF#340  -  []  511.15 531.58 90 top
NOREF#341  -  []  244.85 598.09 0 top
NOREF#342  -  []  293.24 539.53 0 top
NOREF#343  -  []  346.72 564.73 0 top
NOREF#344  -  []  289.94 531.53 0 top
NOREF#345  -  []  101.45 531.58 90 top
NOREF#346  -  []  238.94 598.41 0 top
NOREF#347  -  []  115.82 438.12 90 top
NOREF#348  -  []  321.26 564.09 90 top
NOREF#349  -  []  331.65 539.53 0 top
NOREF#350  -  []  217.77 531.53 90 top
NOREF#351  -  []  436.78 541.43 0 top
NOREF#352  -  []  154.34 602.28 0 top
NOREF#353  -  []  64.56 543.08 90 top
NOREF#354  -  []  104.5 532.8 90 top
NOREF#355  -  []  359.03 543.08 90 top
NOREF#356  -  []  162.39 466.97 0 top
NOREF#357  -  []  225.93 543.53 0 top
NOREF#358  -  []  106.42 599.08 90 top
NOREF#359  -  []  239.33 236.03 0 top
NOREF#360  -  []  144.81 539.53 0 top
NOREF#361  -  []  477.69 539.53 0 top
NOREF#362  -  []  44.48 531.53 0 top
NOREF#363  -  []  539.2 541.43 0 top
NOREF#364  -  []  108.28 595.57 0 top
NOREF#365  -  []  174.69 597.68 90 top
NOREF#366  -  []  501.55 546.23 0 top
NOREF#367  -  []  517.05 546.23 0 top
NOREF#368  -  []  403.73 564.41 0 top
NOREF#369  -  []  505.39 531.53 0 top
NOREF#370  -  []  181.32 544.8 90 top
NOREF#371  -  []  170.66 438.67 90 top
NOREF#372  -  []  567.31 539.53 0 top
NOREF#373  -  []  128.18 439.39 90 top
NOREF#374  -  []  194.67 543.53 0 top
NOREF#375  -  []  208.82 539.53 0 top
NOREF#376  -  []  307.43 564.73 0 top
NOREF#377  -  []  331.65 551.53 0 top
NOREF#378  -  []  319.33 236.03 0 top
NOREF#379  -  []  347.76 544.8 90 top
NOREF#380  -  []  417.97 543.53 0 top
NOREF#381  -  []  11.73 564.25 90 top
NOREF#382  -  []  302.74 531.53 0 top
NOREF#383  -  []  213.48 597.77 90 top
NOREF#384  -  []  435.5 564.09 90 top
NOREF#385  -  []  292.35 598.09 0 top
NOREF#386  -  []  494.84 546.23 0 top
NOREF#387  -  []  363.21 597.77 90 top
NOREF#388  -  []  349.88 598.09 0 top
NOREF#389  -  []  507.19 553.89 90 top
NOREF#390  -  []  128.15 531.53 90 top
NOREF#391  -  []  91.1 541.43 0 top
NOREF#392  -  []  310.59 598.09 0 top
NOREF#393  -  []  117.51 558.24 0 top
NOREF#394  -  []  178.01 551.53 0 top
NOREF#395  -  []  254.67 598.09 0 top
NOREF#396  -  []  266.8 597.77 90 top
NOREF#397  -  []  143.23 602.28 0 top
NOREF#398  -  []  260.52 444.01 90 top
NOREF#399  -  []  253.27 598.09 0 top
NOREF#400  -  []  336.69 564.09 90 top
NOREF#401  -  []  298.86 597.77 90 top
NOREF#402  -  []  110.7 543.53 0 top
NOREF#403  -  []  435.43 543.53 90 top
NOREF#404  -  []  400.87 551.53 0 top
NOREF#405  -  []  386.17 544.8 90 top
NOREF#406  -  []  15.43 543.53 0 top
NOREF#407  -  []  270.14 529.63 90 top
NOREF#408  -  []  47.54 558.24 0 top
NOREF#409  -  []  428.58 551.53 0 top
NOREF#410  -  []  186 603.68 0 top
NOREF#411  -  []  178.26 531.58 90 top
NOREF#412  -  []  40.49 544.8 90 top
NOREF#413  -  []  372.56 541.63 90 top
NOREF#414  -  []  426.48 539.53 0 top
NOREF#415  -  []  72.29 531.53 0 top
NOREF#416  -  []  192.59 532.08 90 top
NOREF#417  -  []  115.86 559.64 0 top
NOREF#418  -  []  219.3 598.41 0 top
NOREF#419  -  []  307.28 597.77 90 top
NOREF#420  -  []  336.85 551.53 0 top
NOREF#421  -  []  194.67 531.53 0 top
NOREF#422  -  []  226.27 156.63 90 top
NOREF#423  -  []  13.35 543.08 90 top
NOREF#424  -  []  349.58 598.41 0 top
NOREF#425  -  []  210.92 539.53 0 top
NOREF#426  -  []  251.53 531.53 0 top
NOREF#427  -  []  70.09 543.53 0 top
NOREF#428  -  []  574.91 539.53 0 top
NOREF#429  -  []  264.34 531.53 0 top
NOREF#430  -  []  531 531.53 0 top
NOREF#431  -  []  390.17 551.53 0 top
NOREF#432  -  []  221.9 597.77 90 top
NOREF#433  -  []  423.77 529.63 90 top
NOREF#434  -  []  64.14 531.53 90 top
NOREF#435  -  []  168.87 587.12 90 top
NOREF#436  -  []  388.07 551.53 0 top
NOREF#437  -  []  338.65 598.09 0 top
NOREF#438  -  []  169.84 602.28 0 top
NOREF#439  -  []  230.83 164.63 0 top
NOREF#440  -  []  285.64 539.53 0 top
NOREF#441  -  []  118.59 597.47 0 top
NOREF#442  -  []  490.49 539.53 0 top
NOREF#443  -  []  59.16 470.23 0 top
NOREF#444  -  []  361.05 564.41 0 top
NOREF#445  -  []  132 551.53 0 top
NOREF#446  -  []  328.53 598.41 0 top
NOREF#447  -  []  242.23 233.13 90 top
NOREF#448  -  []  475.79 532.8 90 top
NOREF#449  -  []  575.76 543.03 90 top
NOREF#450  -  []  370.31 531.58 90 top
NOREF#451  -  []  180.72 553.43 0 top
NOREF#452  -  []  154.54 587.62 90 top
NOREF#453  -  []  147.63 602.28 0 top
NOREF#454  -  []  148.48 446.12 0 top
NOREF#455  -  []  384.64 531.08 90 top
NOREF#456  -  []  121.3 539.53 0 top
NOREF#457  -  []  179.79 543.08 90 top
NOREF#458  -  []  382.18 564.09 90 top
NOREF#459  -  []  148.79 595.57 0 top
NOREF#460  -  []  356.54 564.73 0 top
NOREF#461  -  []  316.2 598.09 0 top
NOREF#462  -  []  282.23 598.41 0 top
NOREF#463  -  []  322.23 173.13 0 top
NOREF#464  -  []  353.96 531.53 0 top
NOREF#465  -  []  411.78 532.8 90 top
NOREF#466  -  []  552 553.89 90 top
NOREF#467  -  []  269.81 598.41 0 top
NOREF#468  -  []  67.99 539.53 0 top
NOREF#469  -  []  1.47 541.43 0 top
NOREF#470  -  []  125.39 587.57 0 top
NOREF#471  -  []  257.33 529.63 90 top
NOREF#472  -  []  551.8 529.63 90 top
NOREF#473  -  []  87.72 602.28 0 top
NOREF#474  -  []  189.2 563.8 0 top
NOREF#475  -  []  545.96 546.23 0 top
NOREF#476  -  []  166.99 543.08 90 top
NOREF#477  -  []  399.52 531.53 0 top
NOREF#478  -  []  179.79 544.08 90 top
NOREF#479  -  []  353.73 564.73 0 top
NOREF#480  -  []  203.87 531.58 90 top
NOREF#481  -  []  311.49 597.77 90 top
NOREF#482  -  []  196.02 551.53 0 top
NOREF#483  -  []  193.52 541.43 0 top
NOREF#484  -  []  238.73 531.53 0 top
NOREF#485  -  []  144.81 551.53 0 top
NOREF#486  -  []  562.36 531.58 90 top
NOREF#487  -  []  332.74 598.41 0 top
NOREF#488  -  []  280.77 564.73 0 top
NOREF#489  -  []  67.99 539.53 0 top
NOREF#490  -  []  156.26 531.53 0 top
NOREF#491  -  []  559.26 546.23 0 top
NOREF#492  -  []  330.23 598.09 0 top
NOREF#493  -  []  304.92 564.41 0 top
NOREF#494  -  []  417.46 564.73 0 top
NOREF#495  -  []  366.76 543.53 0 top
NOREF#496  -  []  249.33 531.53 0 top
NOREF#497  -  []  386.72 531.53 0 top
NOREF#498  -  []  280.44 539.53 0 top
NOREF#499  -  []  340.9 564.09 90 top
NOREF#500  -  []  207.47 531.53 0 top
NOREF#501  -  []  400.87 551.53 0 top
NOREF#502  -  []  418.66 564.09 90 top
NOREF#503  -  []  371.84 543.08 90 top
NOREF#504  -  []  196.02 539.53 0 top
NOREF#505  -  []  68.09 563.8 0 top
NOREF#506  -  []  220.58 466.36 90 top
NOREF#507  -  []  514.75 531.53 0 top
NOREF#508  -  []  67.99 539.53 0 top
NOREF#509  -  []  322.86 564.73 0 top
NOREF#510  -  []  176.19 446.12 0 top
NOREF#511  -  []  165.44 602.28 0 top
NOREF#512  -  []  81.2 259.59 90 top
NOREF#513  -  []  427.28 564.73 0 top
NOREF#514  -  []  311.99 598.09 0 top
NOREF#515  -  []  423.37 564.41 0 top
NOREF#516  -  []  300.41 564.73 0 top
NOREF#517  -  []  410.24 532.08 90 top
NOREF#518  -  []  229.16 564.25 90 top
NOREF#519  -  []  209.78 598.09 0 top
NOREF#520  -  []  94.33 260.49 90 top
NOREF#521  -  []  534.85 546.23 0 top
NOREF#522  -  []  161.28 446.12 0 top
NOREF#523  -  []  326.15 531.53 0 top
NOREF#524  -  []  310.54 564.41 0 top
NOREF#525  -  []  219.6 598.09 0 top
NOREF#526  -  []  398.37 541.43 0 top
NOREF#527  -  []  554.51 539.53 0 top
NOREF#528  -  []  125.11 558.24 0 top
NOREF#529  -  []  162.91 137.71 90 top
NOREF#530  -  []  287.74 539.53 0 top
NOREF#531  -  []  411.17 541.43 0 top
NOREF#532  -  []  13.35 532.08 90 top
NOREF#533  -  []  336.89 564.73 0 top
NOREF#534  -  []  406.54 564.41 0 top
NOREF#535  -  []  469.19 531.53 0 top
NOREF#536  -  []  124.24 465.06 90 top
NOREF#537  -  []  417.26 564.09 90 top
NOREF#538  -  []  166.99 532.08 90 top
NOREF#539  -  []  381.06 598.41 0 top
NOREF#540  -  []  117.31 544.8 90 top
NOREF#541  -  []  313.1 598.41 0 top
NOREF#542  -  []  288.37 448.61 0 top
NOREF#543  -  []  14.88 544.8 90 top
NOREF#544  -  []  441.38 531.53 0 top
NOREF#545  -  []  119.2 551.53 0 top
NOREF#546  -  []  28.23 531.53 0 top
NOREF#547  -  []  179.79 531.08 90 top
NOREF#548  -  []  292 564.73 0 top
NOREF#549  -  []  481.09 553.89 90 top
NOREF#550  -  []  452.08 539.53 0 top
NOREF#551  -  []  525.95 546.23 0 top
NOREF#552  -  []  317.57 209.63 90 top
NOREF#553  -  []  389.2 564.09 90 top
NOREF#554  -  []  18.14 564.25 90 top
NOREF#555  -  []  442.72 564.73 0 top
NOREF#556  -  []  154.91 529.63 90 top
NOREF#557  -  []  286.23 597.77 90 top
NOREF#558  -  []  99.71 558.24 0 top
NOREF#559  -  []  53.29 544.8 90 top
NOREF#560  -  []  126.76 553.64 90 top
NOREF#561  -  []  91.1 553.43 0 top
NOREF#562  -  []  21.08 543.53 0 top
NOREF#563  -  []  210.92 551.53 0 top
NOREF#564  -  []  163.79 603.68 0 top
NOREF#565  -  []  333.94 597.77 90 top
NOREF#566  -  []  564.81 541.43 0 top
NOREF#567  -  []  170.41 539.53 0 top
NOREF#568  -  []  111.97 438.12 0 top
NOREF#569  -  []  95.31 558.24 0 top
NOREF#570  -  []  157 597.47 0 top
NOREF#571  -  []  331.13 597.77 90 top
NOREF#572  -  []  78.03 283.35 90 top
NOREF#573  -  []  26.88 529.63 90 top
NOREF#574  -  []  400.87 539.53 0 top
NOREF#575  -  []  106.4 539.53 0 top
NOREF#576  -  []  513.39 529.63 90 top
NOREF#577  -  []  101.02 602.28 0 top
NOREF#578  -  []  29.58 551.53 0 top
NOREF#579  -  []  247.23 539.53 0 top
NOREF#580  -  []  218.2 544.08 90 top
NOREF#581  -  []  31.68 543.53 0 top
NOREF#582  -  []  144.81 551.53 0 top
NOREF#583  -  []  376.64 597.77 90 top
NOREF#584  -  []  334.35 541.43 0 top
NOREF#585  -  []  108.27 603.68 0 top
NOREF#586  -  []  490.44 546.23 0 top
NOREF#587  -  []  262.79 598.41 0 top
NOREF#588  -  []  288.09 564.41 0 top
NOREF#589  -  []  256.18 531.53 90 top
NOREF#590  -  []  296.5 564.41 0 top
NOREF#591  -  []  52.69 553.43 0 top
NOREF#592  -  []  81.2 241.81 90 top
NOREF#593  -  []  284.78 564.09 90 top
NOREF#594  -  []  243.45 598.09 0 top
NOREF#595  -  []  552.61 532.8 90 top
NOREF#596  -  []  269.41 531.08 90 top
NOREF#597  -  []  139.73 599.08 90 top
NOREF#598  -  []  357.26 539.53 0 top
NOREF#599  -  []  209.94 564.25 90 top
NOREF#600  -  []  386.89 564.41 0 top
NOREF#601  -  []  338.95 539.53 0 top
NOREF#602  -  []  231.93 541.43 0 top
NOREF#603  -  []  66.64 531.53 0 top
NOREF#604  -  []  130.48 603.68 0 top
NOREF#605  -  []  172.51 551.53 0 top
NOREF#606  -  []  260.04 539.53 0 top
NOREF#607  -  []  23.68 559.64 0 top
NOREF#608  -  []  216.67 543.58 90 top
NOREF#609  -  []  61.72 263.03 90 top
NOREF#610  -  []  327.07 564.73 0 top
NOREF#611  -  []  310.17 275.68 90 top
NOREF#612  -  []  311.25 539.53 0 top
NOREF#613  -  []  375.26 539.53 0 top
NOREF#614  -  []  333.43 532.08 90 top
NOREF#615  -  []  192.05 602.28 0 top
NOREF#616  -  []  167.91 553.43 0 top
NOREF#617  -  []  310.83 224.63 0 top
NOREF#618  -  []  357.51 543.58 90 top
NOREF#619  -  []  375.24 597.77 90 top
NOREF#620  -  []  42.38 551.53 0 top
NOREF#621  -  []  183.22 551.53 0 top
NOREF#622  -  []  284.83 597.77 90 top
NOREF#623  -  []  50.17 564.25 90 top
NOREF#624  -  []  283.37 564.09 90 top
NOREF#625  -  []  503.99 553.89 90 top
NOREF#626  -  []  514.2 532.8 90 top
NOREF#627  -  []  523.75 546.23 0 top
NOREF#628  -  []  267.6 564.25 90 top
NOREF#629  -  []  432.69 564.09 90 top
NOREF#630  -  []  364.56 539.53 0 top
NOREF#631  -  []  146.69 595.57 0 top
NOREF#632  -  []  450.73 531.53 0 top
NOREF#633  -  []  38.95 532.08 90 top
NOREF#634  -  []  2.08 544.8 90 top
NOREF#635  -  []  477.69 539.53 0 top
NOREF#636  -  []  501.4 532.8 90 top
NOREF#637  -  []  21.08 531.53 0 top
NOREF#638  -  []  294.59 531.53 90 top
NOREF#639  -  []  538.28 531.08 90 top
NOREF#640  -  []  328.33 247.93 0 top
NOREF#641  -  []  229.12 598.41 0 top
NOREF#642  -  []  119.38 603.68 0 top
NOREF#643  -  []  551.08 532.08 90 top
NOREF#644  -  []  159.71 543.53 0 top
NOREF#645  -  []  295.94 555.04 90 top
NOREF#646  -  []  12.58 559.64 0 top
NOREF#647  -  []  411.85 564.73 0 top
NOREF#648  -  []  3.12 558.24 0 top
NOREF#649  -  []  298.44 539.53 0 top
NOREF#650  -  []  498.09 539.53 0 top
NOREF#651  -  []  117.23 587.57 90 top
NOREF#652  -  []  102.54 543.53 90 top
NOREF#653  -  []  171.64 466.42 0 top
NOREF#654  -  []  192.17 531.53 90 top
NOREF#655  -  []  435.85 532.08 90 top
NOREF#656  -  []  158.15 587.57 0 top
NOREF#657  -  []  39.68 529.63 90 top
NOREF#658  -  []  371.53 598.09 0 top
NOREF#659  -  []  531 539.53 0 top
NOREF#660  -  []  302.12 564.41 0 top
NOREF#661  -  []  345.61 564.41 0 top
NOREF#662  -  []  372.94 598.09 0 top
NOREF#663  -  []  378.05 597.77 90 top
NOREF#664  -  []  566.31 541.63 90 top
NOREF#665  -  []  395.67 551.53 0 top
NOREF#666  -  []  335.55 598.41 0 top
NOREF#667  -  []  364.56 551.53 0 top
NOREF#668  -  []  252.86 448.61 0 top
NOREF#669  -  []  216.35 564.25 90 top
NOREF#670  -  []  133.28 438.12 0 top
NOREF#671  -  []  359.21 598.41 0 top
NOREF#672  -  []  123.5 531.53 0 top
NOREF#673  -  []  218.66 464.36 90 top
NOREF#674  -  []  437.41 564.41 0 top
NOREF#675  -  []  271.62 449.16 0 top
NOREF#676  -  []  350.72 564.09 90 top
NOREF#677  -  []  254.83 539.53 0 top
NOREF#678  -  []  386.39 564.09 90 top
NOREF#679  -  []  186 603.68 0 top
NOREF#680  -  []  523.7 539.53 0 top
NOREF#681  -  []  346.23 543.08 90 top
NOREF#682  -  []  159.17 139.43 0 top
NOREF#683  -  []  89.74 531.53 90 top
NOREF#684  -  []  168.45 587.57 90 top
NOREF#685  -  []  338.95 543.53 0 top
NOREF#686  -  []  129.5 541.43 0 top
NOREF#687  -  []  3.97 539.53 0 top
NOREF#688  -  []  534.85 546.23 0 top
NOREF#689  -  []  415.77 539.53 0 top
NOREF#690  -  []  156.07 588.12 90 top
NOREF#691  -  []  339.7 564.73 0 top
NOREF#692  -  []  165.21 539.53 0 top
NOREF#693  -  []  149.11 531.53 0 top
NOREF#694  -  []  314.8 598.09 0 top
NOREF#695  -  []  324.62 598.09 0 top
NOREF#696  -  []  334.15 529.63 90 top
NOREF#697  -  []  433.2 564.41 0 top
NOREF#698  -  []  154.91 541.63 90 top
NOREF#699  -  []  308.75 541.43 0 top
NOREF#700  -  []  137.87 553.64 90 top
NOREF#701  -  []  400.87 539.53 0 top
NOREF#702  -  []  126.65 437.67 90 top
NOREF#703  -  []  520.25 546.23 0 top
NOREF#704  -  []  347.76 532.8 90 top
NOREF#705  -  []  208.82 551.53 0 top
NOREF#706  -  []  372.64 598.41 0 top
NOREF#707  -  []  385.36 529.63 90 top
NOREF#708  -  []  50.23 531.58 90 top
NOREF#709  -  []  384.09 564.41 0 top
NOREF#710  -  []  189.85 602.28 0 top
NOREF#711  -  []  286.38 564.73 0 top
NOREF#712  -  []  362.46 551.53 0 top
NOREF#713  -  []  38.53 531.53 90 top
NOREF#714  -  []  150.99 587.57 0 top
NOREF#715  -  []  230.58 543.53 90 top
NOREF#716  -  []  239.33 236.03 90 top
NOREF#717  -  []  234.33 228.13 90 top
NOREF#718  -  []  163.38 446.12 0 top
NOREF#719  -  []  301.87 598.41 0 top
NOREF#720  -  []  425.13 543.53 0 top
NOREF#721  -  []  44.48 539.53 0 top
NOREF#722  -  []  272.84 539.53 0 top
NOREF#723  -  []  393.92 556.34 0 top
NOREF#724  -  []  57.29 539.53 0 top
NOREF#725  -  []  41.03 531.53 0 top
NOREF#726  -  []  65.29 529.63 90 top
NOREF#727  -  []  379.65 598.41 0 top
NOREF#728  -  []  78.09 541.63 90 top
NOREF#729  -  []  67.99 551.53 0 top
NOREF#730  -  []  38.95 543.08 90 top
NOREF#731  -  []  124.24 470.21 0 top
NOREF#732  -  []  293.25 597.77 90 top
NOREF#733  -  []  486.64 531.53 90 top
NOREF#734  -  []  260.83 174.63 90 top
NOREF#735  -  []  30.31 469.51 0 top
NOREF#736  -  []  58.64 558.24 0 top
NOREF#737  -  []  481.99 531.53 0 top
NOREF#738  -  []  509.15 546.23 0 top
NOREF#739  -  []  65.49 541.43 0 top
NOREF#740  -  []  413.25 564.73 0 top
NOREF#741  -  []  343.83 231.63 90 top
NOREF#742  -  []  117.66 587.12 90 top
NOREF#743  -  []  449.58 541.43 0 top
NOREF#744  -  []  548.16 546.23 0 top
NOREF#745  -  []  285.64 539.53 0 top
NOREF#746  -  []  334.14 598.41 0 top
NOREF#747  -  []  106.4 551.53 0 top
NOREF#748  -  []  277.96 564.73 0 top
NOREF#749  -  []  337.19 564.41 0 top
NOREF#750  -  []  306.03 564.73 0 top
NOREF#751  -  []  555.41 547.63 0 top
NOREF#752  -  []  111.05 263.03 90 top
NOREF#753  -  []  203.87 543.58 90 top
NOREF#754  -  []  39.56 468.96 0 top
NOREF#755  -  []  434.1 564.09 90 top
NOREF#756  -  []  398.17 541.63 90 top
NOREF#757  -  []  277.76 564.09 90 top
NOREF#758  -  []  359.03 532.08 90 top
NOREF#759  -  []  163.64 466.42 0 top
NOREF#760  -  []  306.3 531.58 90 top
NOREF#761  -  []  372.76 541.43 0 top
NOREF#762  -  []  528.9 539.53 0 top
NOREF#763  -  []  140.95 543.53 90 top
NOREF#764  -  []  459.68 539.53 0 top
NOREF#765  -  []  220.7 598.41 0 top
NOREF#766  -  []  218.19 598.09 0 top
NOREF#767  -  []  363.35 564.09 90 top
NOREF#768  -  []  219.55 564.25 90 top
NOREF#769  -  []  306.27 156.63 90 top
NOREF#770  -  []  119.17 597.68 90 top
NOREF#771  -  []  375.26 539.53 0 top
NOREF#772  -  []  63.04 531.58 90 top
NOREF#773  -  []  59.49 543.53 0 top
NOREF#774  -  []  80.79 539.53 0 top
NOREF#775  -  []  476.34 531.53 0 top
NOREF#776  -  []  188.29 293.08 90 top
NOREF#777  -  []  296.56 598.09 0 top
NOREF#778  -  []  39.88 541.43 0 top
NOREF#779  -  []  131.08 438.12 0 top
NOREF#780  -  []  64.56 532.08 90 top
NOREF#781  -  []  400.72 553.64 90 top
NOREF#782  -  []  361.11 531.53 0 top
NOREF#783  -  []  261.63 173.83 90 top
NOREF#784  -  []  234.53 597.77 90 top
NOREF#785  -  []  66.64 543.53 0 top
NOREF#786  -  []  373.37 532.8 90 top
NOREF#787  -  []  248.56 597.77 90 top
NOREF#788  -  []  201.22 558.24 0 top
NOREF#789  -  []  23.68 559.64 0 top
NOREF#790  -  []  260.52 449.16 0 top
NOREF#791  -  []  95.7 539.53 0 top
NOREF#792  -  []  77.36 544.08 90 top
NOREF#793  -  []  373.91 543.53 0 top
NOREF#794  -  []  315.7 597.77 90 top
NOREF#795  -  []  306.83 209.63 90 top
NOREF#796  -  []  526.4 541.43 0 top
NOREF#797  -  []  314.33 168.13 90 top
NOREF#798  -  []  139.85 531.58 90 top
NOREF#799  -  []  516.1 539.53 0 top
NOREF#800  -  []  500.79 553.89 90 top
NOREF#801  -  []  254.79 564.25 90 top
NOREF#802  -  []  338.09 564.09 90 top
NOREF#803  -  []  531.35 546.23 0 top
NOREF#804  -  []  259.99 598.41 0 top
NOREF#805  -  []  55.14 555.04 90 top
NOREF#806  -  []  326.23 233.13 0 top
NOREF#807  -  []  384.96 598.09 0 top
NOREF#808  -  []  201.22 558.24 0 top
NOREF#809  -  []  426.18 564.41 0 top
NOREF#810  -  []  163.38 438.12 0 top
NOREF#811  -  []  258.58 598.41 0 top
NOREF#812  -  []  407.64 564.73 0 top
NOREF#813  -  []  108.77 446.12 0 top
NOREF#814  -  []  237.57 269.63 90 top
NOREF#815  -  []  176.54 602.28 0 top
NOREF#816  -  []  377.07 564.41 0 top
NOREF#817  -  []  155.11 541.43 0 top
NOREF#818  -  []  514.85 546.23 0 top
NOREF#819  -  []  255.08 531.58 90 top
NOREF#820  -  []  566.51 547.63 0 top
NOREF#821  -  []  328.27 564.09 90 top
NOREF#822  -  []  267.89 531.58 90 top
NOREF#823  -  []  106.57 446.12 0 top
NOREF#824  -  []  259.78 597.77 90 top
NOREF#825  -  []  190.82 539.53 0 top
NOREF#826  -  []  147.13 438.12 0 top
NOREF#827  -  []  392.21 564.73 0 top
NOREF#828  -  []  268.99 531.53 90 top
NOREF#829  -  []  344.21 564.41 0 top
NOREF#830  -  []  234.43 551.53 0 top
NOREF#831  -  []  499.87 531.08 90 top
NOREF#832  -  []  97.17 603.68 0 top
NOREF#833  -  []  388.07 539.53 0 top
NOREF#834  -  []  104.56 553.64 90 top
NOREF#835  -  []  132.13 602.28 0 top
NOREF#836  -  []  408.84 564.09 90 top
NOREF#837  -  []  550.36 546.23 0 top
NOREF#838  -  []  303.02 564.09 90 top
NOREF#839  -  []  126.97 559.64 0 top
NOREF#840  -  []  272.87 448.61 0 top
NOREF#841  -  []  46.97 564.25 90 top
NOREF#842  -  []  243.38 531.53 90 top
NOREF#843  -  []  382.38 564.73 0 top
NOREF#844  -  []  250.18 182.88 0 top
NOREF#845  -  []  208.37 598.09 0 top
NOREF#846  -  []  375.26 551.53 0 top
NOREF#847  -  []  152.66 531.58 90 top
NOREF#848  -  []  467.86 554.91 0 top
NOREF#849  -  []  398.37 553.43 0 top
NOREF#850  -  []  335.5 543.53 0 top
NOREF#851  -  []  217.89 598.41 0 top
NOREF#852  -  []  310.24 564.73 0 top
NOREF#853  -  []  295.02 532.08 90 top
NOREF#854  -  []  310.29 598.41 0 top
NOREF#855  -  []  374.34 598.09 0 top
NOREF#856  -  []  130.46 587.12 90 top
NOREF#857  -  []  516.1 539.53 0 top
NOREF#858  -  []  563.88 532.08 90 top
NOREF#859  -  []  95.7 543.53 0 top
NOREF#860  -  []  317.1 597.77 90 top
NOREF#861  -  []  260.29 598.09 0 top
NOREF#862  -  []  297.09 531.53 0 top
NOREF#863  -  []  136.53 602.28 0 top
NOREF#864  -  []  112.32 438.17 90 top
NOREF#865  -  []  575.76 546.23 0 top
NOREF#866  -  []  209.56 470.01 0 top
NOREF#867  -  []  3.97 551.53 0 top
NOREF#868  -  []  434.33 531.58 90 top
NOREF#869  -  []  79.44 543.53 0 top
NOREF#870  -  []  136.3 543.53 0 top
NOREF#871  -  []  205.4 543.08 90 top
NOREF#872  -  []  386.72 543.53 0 top
NOREF#873  -  []  537.05 546.23 0 top
NOREF#874  -  []  333.04 598.09 0 top
NOREF#875  -  []  336.85 539.53 0 top
NOREF#876  -  []  102.91 555.04 90 top
NOREF#877  -  []  283.58 564.73 0 top
NOREF#878  -  []  421.27 539.53 0 top
NOREF#879  -  []  527.55 531.53 0 top
NOREF#880  -  []  66.09 544.8 90 top
NOREF#881  -  []  94.74 219.85 90 top
NOREF#882  -  []  362.46 539.53 0 top
NOREF#883  -  []  128.58 532.08 90 top
NOREF#884  -  []  117.31 532.8 90 top
NOREF#885  -  []  156.08 446.12 0 top
NOREF#886  -  []  349.82 564.41 0 top
NOREF#887  -  []  285.28 564.41 0 top
NOREF#888  -  []  176.34 466.42 0 top
NOREF#889  -  []  64.56 467.03 90 top
NOREF#890  -  []  479.79 531.53 0 top
NOREF#891  -  []  322.7 531.53 0 top
NOREF#892  -  []  390.8 564.73 0 top
NOREF#893  -  []  349.37 597.77 90 top
NOREF#894  -  []  334.39 564.41 0 top
NOREF#895  -  []  141.38 597.68 90 top
NOREF#896  -  []  90.89 529.63 90 top
NOREF#897  -  []  282.17 564.73 0 top
NOREF#898  -  []  96.31 468.3 90 top
NOREF#899  -  []  90.89 541.63 90 top
NOREF#900  -  []  178.74 602.28 0 top
